# EAGLE board plate (EAGLE 9.5.0)
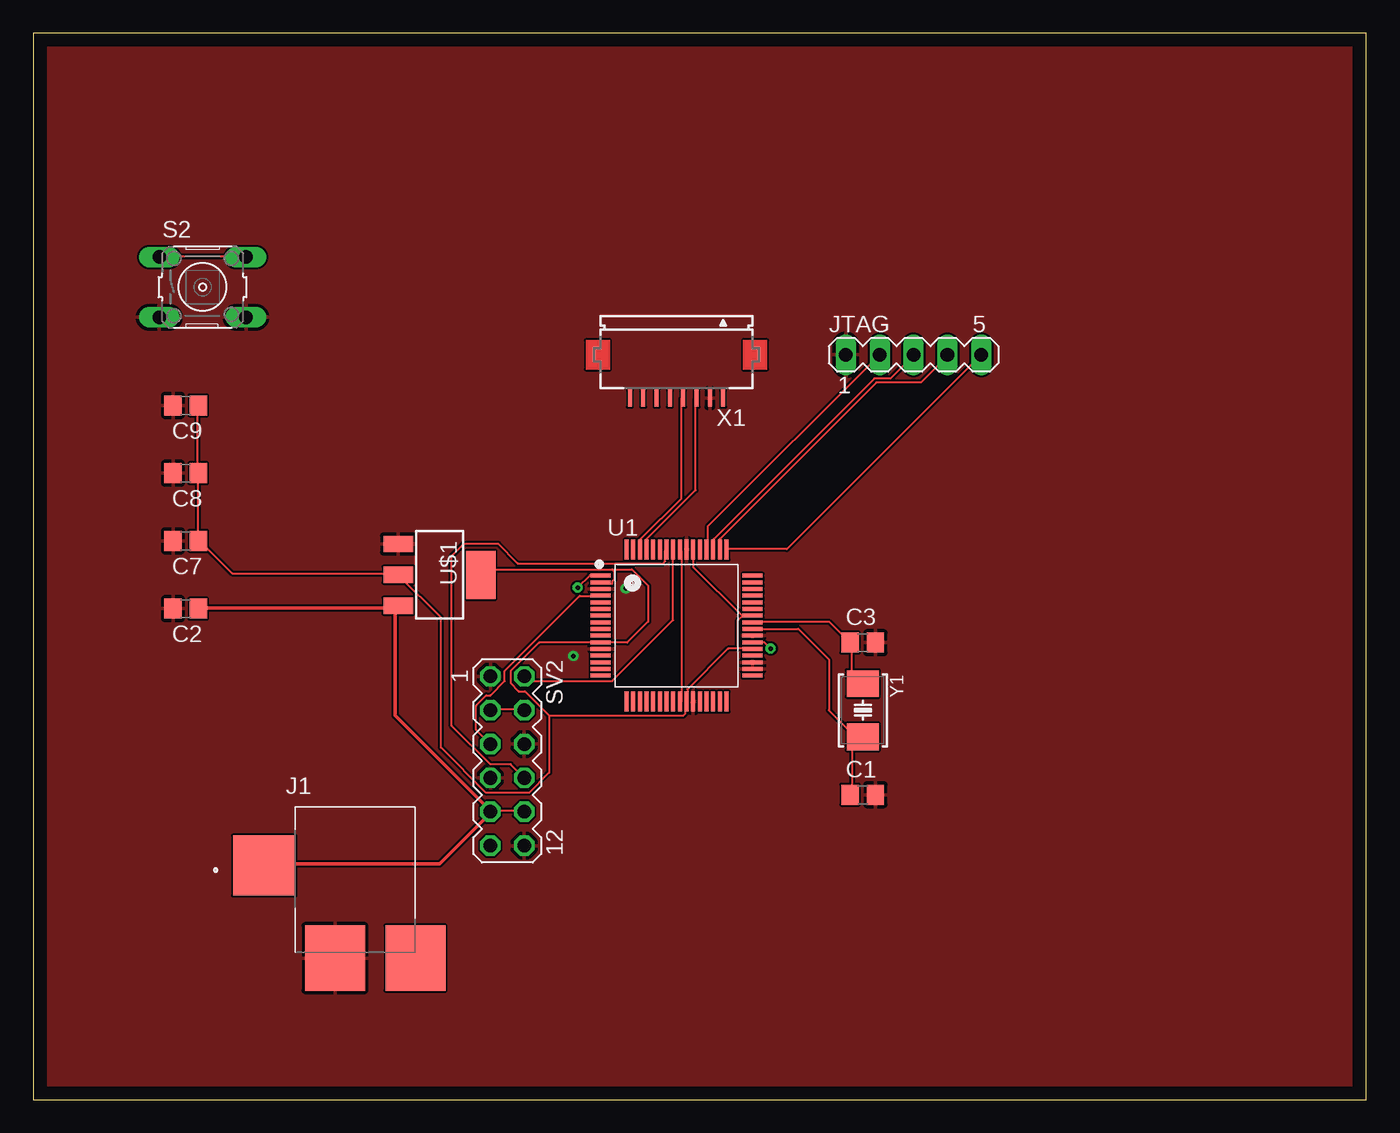
[diagram p0: board, top side]
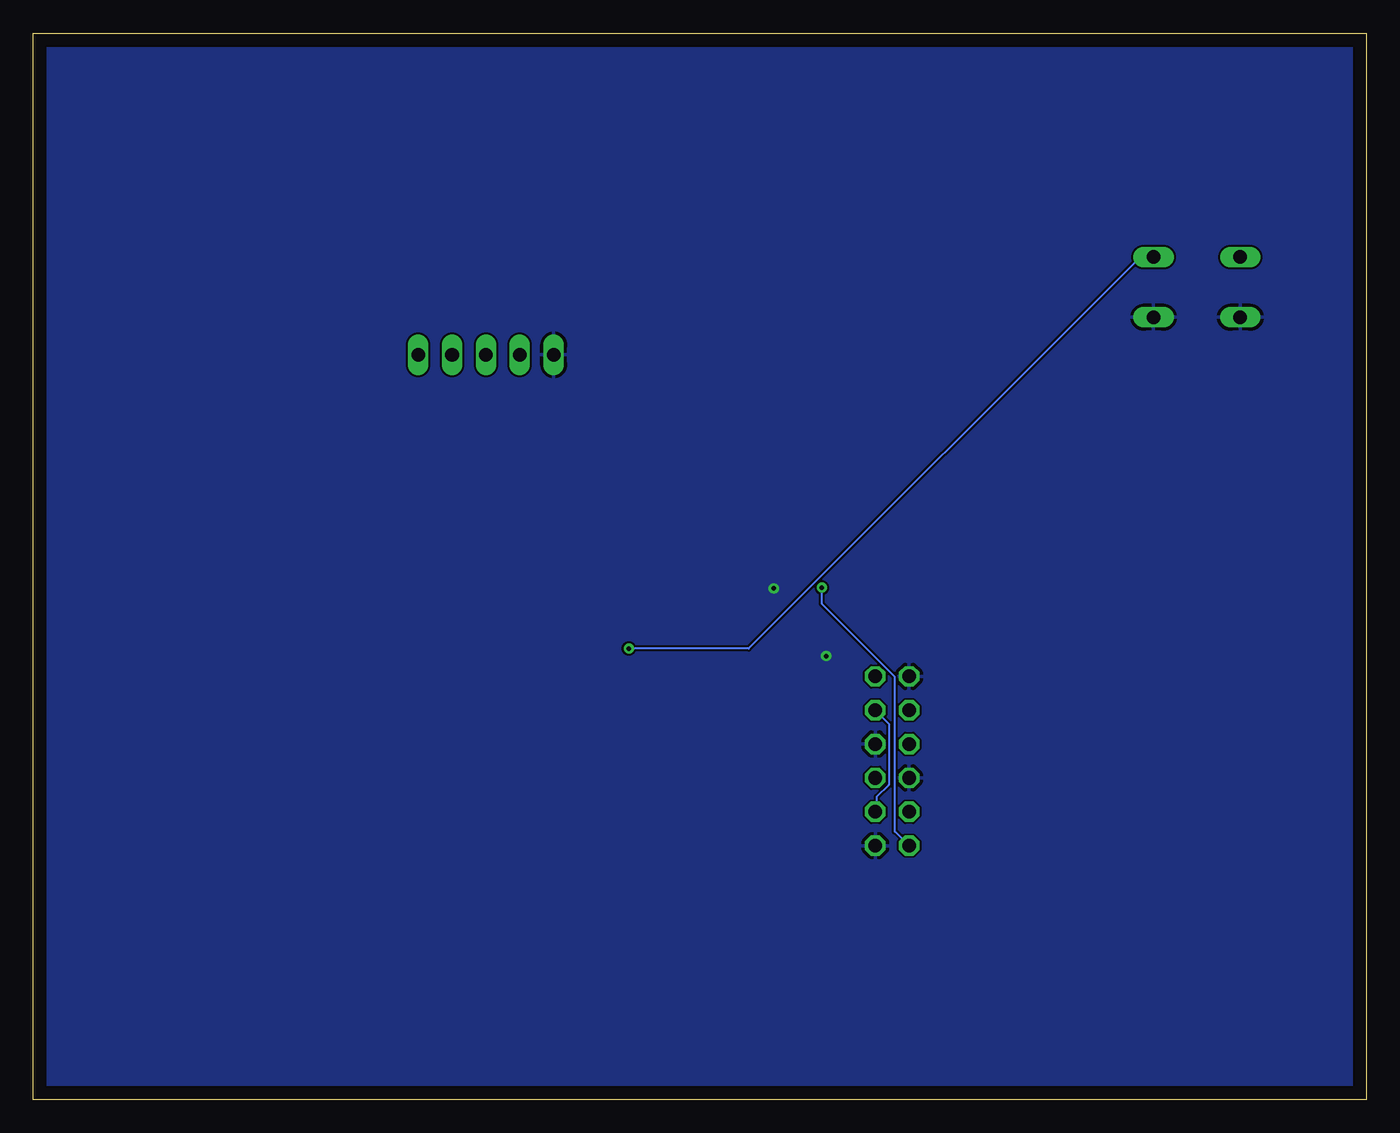
[diagram p1: board, bottom side, seen from below]

Size 100 x 80 mm. Coordinates in mm from the lower left corner, seen from the top.
Outline: 0,0 100,0 100,80 0,80 0,0
Copper layers (1*16): Top 0.035mm / dielectric 1.5mm / Bottom 0.035mm
Design rules "default": minimum track width 6mil, minimum drill 0.35mm, track to track 6mil, track to pad 6mil, pad to pad 6mil, via to via 6mil, smd to smd 6mil, copper to edge 40mil, drill to drill 6mil, minimum pad ring 10mil, minimum via ring 8mil, stop-mask expansion 4mil, vias tented up to drill 0mil, thermal gap 10mil

## Footprints (pad centres in the part's own frame; a part is rotated, then mirrored left to right if it is on the bottom)
C0805 = smd 1.3 x 1.5: 1 -0.95,0; 2 0.95,0
CUI_PJ-PJ-070BH-SMT-TR = smd 4.7 x 4.5: 1 -6.8,1.05 | smd 4.5 x 4.9: 2 -1.5,-5.9; 3 4.55,-5.9
MA05-1 = drill 1.016 long: 1 -5.08,0; 2 -2.54,0; 3 0,0; 4 2.54,0; 5 5.08,0
B3F-10XX = drill 1.016 long: 1 -3.251,2.261; 2 3.251,2.261; 3 -3.251,-2.261; 4 3.251,-2.261
MA06-2 = drill 1.016 octagon: 1 -6.35,-1.27; 2 -6.35,1.27; 3 -3.81,-1.27; 4 -3.81,1.27; 5 -1.27,-1.27; 6 -1.27,1.27; 7 1.27,-1.27; 8 1.27,1.27; 9 3.81,-1.27; 10 3.81,1.27; 11 6.35,-1.27; 12 6.35,1.27
QFP50P1200X1200X160-64N = smd 1.5 x 0.3: 1 -5.7,3.75; 2 -5.7,3.25; 3 -5.7,2.75; 4 -5.7,2.25; 5 -5.7,1.75; 6 -5.7,1.25; 7 -5.7,0.75; 8 -5.7,0.25; 9 -5.7,-0.25; 10 -5.7,-0.75; 11 -5.7,-1.25; 12 -5.7,-1.75; 13 -5.7,-2.25; 14 -5.7,-2.75; 15 -5.7,-3.25; 16 -5.7,-3.75; 33 5.7,-3.75; 34 5.7,-3.25; 35 5.7,-2.75; 36 5.7,-2.25; 37 5.7,-1.75; 38 5.7,-1.25; 39 5.7,-0.75; 40 5.7,-0.25; 41 5.7,0.25; 42 5.7,0.75; 43 5.7,1.25; 44 5.7,1.75; 45 5.7,2.25; 46 5.7,2.75; 47 5.7,3.25; 48 5.7,3.75 | smd 0.3 x 1.5: 17 -3.75,-5.7; 18 -3.25,-5.7; 19 -2.75,-5.7; 20 -2.25,-5.7; 21 -1.75,-5.7; 22 -1.25,-5.7; 23 -0.75,-5.7; 24 -0.25,-5.7; 25 0.25,-5.7; 26 0.75,-5.7; 27 1.25,-5.7; 28 1.75,-5.7; 29 2.25,-5.7; 30 2.75,-5.7; 31 3.25,-5.7; 32 3.75,-5.7; 49 3.75,5.7; 50 3.25,5.7; 51 2.75,5.7; 52 2.25,5.7; 53 1.75,5.7; 54 1.25,5.7; 55 0.75,5.7; 56 0.25,5.7; 57 -0.25,5.7; 58 -0.75,5.7; 59 -1.25,5.7; 60 -1.75,5.7; 61 -2.25,5.7; 62 -2.75,5.7; 63 -3.25,5.7; 64 -3.75,5.7
SOT223 = smd 1.219 x 2.235: 1 -2.311,-3.099; 2 0,-3.099; 3 2.311,-3.099 | smd 3.6 x 2.2: 4 0,3.099
FH12-08S-1SH = smd 0.3 x 1.3: 1 -3.5,3.25; 2 -2.5,3.25; 3 -1.5,3.25; 4 -0.5,3.25; 5 0.5,3.25; 6 1.5,3.25; 7 2.5,3.25; 8 3.5,3.25
2-SMD-5X3 = smd 2 x 2.4: 1 -2,0; 2 2,0

## Placement (x,y rotation side)
C1  1uF  [C0805]  62.23,22.86 0 top
C2  4.7uF  [C0805]  11.43,36.83 180 top
C3  1uF  [C0805]  62.23,34.29 0 top
C7  4.7uF  [C0805]  11.43,41.91 180 top
C8  1uF  [C0805]  11.43,46.99 180 top
C9  1uF  [C0805]  11.43,52.07 180 top
J1  PJ-070BH-SMT-TR  [CUI_PJ-PJ-070BH-SMT-TR]  24.13,16.51 0 top
JTAG  [MA05-1]  66.04,55.88 0 top
S2  [B3F-10XX]  12.7,60.96 0 top
SV2  [MA06-2]  35.56,25.4 270 top
U1  TM4C123GH6PMI  [QFP50P1200X1200X160-64N]  48.26,35.56 0 top
U$1  AP2114H-3.3TRG1  [SOT223]  30.48,39.37 270 top
X1  FH12-08S-1SH  [FH12-08S-1SH]  48.26,55.88 180 top
Y1  NX5032GA  [2-SMD-5X3]  62.23,29.21 270 top

## Library data of the parts
C1-C3 C7-C9 = rcl; SPICEPREFIX: C
J1 = PJ-070BH-SMT-TR; CUI_PURCHASE_URL: https://www.cuidevices.com/product/interconnect/connectors/dc-power-connectors/jacks/pj-070bh-smt-tr?utm_source=snapeda.com&utm_medium=referral&utm_campaign=snapedaBOM; DESCRIPTION: 2.5 x 6.3 mm, 5.0 A, Vertical, Surface Mount _SMT_, Dc Power Jack Connector; DIGI-KEY_PART_NUMBER: CP-070BHPJCT-ND; DIGI-KEY_PURCHASE_URL: https://www.digikey.com/product-detail/en/cui-devices/PJ-070BH-SMT-TR/CP-070BHPJCT-ND/3466653?utm_source=snapeda&utm_medium=aggregator&utm_campaign=symbol; MF: CUI Devices; MP: PJ-070BH-SMT-TR; PACKAGE: None
JTAG SV2 = con-lstb; OC_FARNELL: unknown; OC_NEWARK: unknown
S2 = switch-omron; MPN: B3F-1000; OC_FARNELL: 176432; OC_NEWARK: 36M3542
U1 = TM4C123GH6PMI; AVAILABILITY: Unavailable; DESCRIPTION: MCU 32-Bit Tiva C ARM Cortex M4F RISC 256KB Flash 1.2V/3.3V 64-Pin LQFP Tray/Tube; MF: Texas Instruments; MP: TM4C123GH6PMI; PACKAGE: LQFP-64 Texas Instruments; PRICE: None
U$1 = AP2114
X1 = con-hirose; OC_FARNELL: unknown; OC_NEWARK: unknown
Y1 = NX5032GA; AVAILABILITY: Unavailable; DESCRIPTION: 20MHz, 50ppm, NX5032GA, QUARTZ CRYSTAL/20MH; MF: NDK America,; MP: NX5032GA; PACKAGE: SMD-2 NDK America,; PRICE: None

## Nets
3,3V: X1.1
3.3V: C7.1 C8.1 C9.1 U1.2 U1.11 U1.26 U1.37 U1.42 U1.54 U$1.2 U$1.4
5V: C2.1 J1.1 SV2.3 SV2.4 SV2.9 SV2.10 U$1.3
GND: C1.2 C2.2 C3.2 C7.2 C8.2 C9.2 J1.2 JTAG.1 S2.3 S2.4 SV2.1 SV2.6 SV2.7 SV2.12 U1.3 U1.12 U1.27 U1.34 U1.35 U1.39 U1.55 U$1.1 X1.2
N$6: S2.1 S2.2 U1.38
N$13: X1.5
N$14: X1.6
N$15: X1.7
N$16: X1.8
OSC0: C1.1 U1.40 Y1.2
OSC1: C3.1 U1.41 Y1.1
PA2: U1.19
PA3: U1.20
PA5: U1.22
RESX: U1.61 X1.3
RESY: U1.62 X1.4
SERV0: SV2.8 U1.58
SERV1: SV2.2 U1.57
SERV2: SV2.11 U1.1
SERV3: SV2.5 U1.4
TCK: JTAG.2 U1.52
TDI: JTAG.4 U1.50
TDO: JTAG.5 U1.49
TMS: JTAG.3 U1.51
VDDC: U1.25 U1.56
WAKE: U1.32

## Tracks (layer width: path | path; a pad name or v marks a point on that pad's centre or on a via)
3.3V
  Top 0.152: C9.1 12.34,51.97 12.34,47.09 C8.1 12.34,46.94 12.34,41.91 C7.1 12.5,41.91 14.94,39.47 27.28,39.47 U$1.2 30.58,36.17 30.58,26.42 33.98,23.01 37.19,23.01 38.71,24.54 38.71,28.8 | 52.88,33.83 53.95,33.83 U1.37 | 52.88,33.83 52.12,33.83 49.07,30.79 49.07,29.87 U1.26 48.92,29.72 48.92,28.96 48.77,28.8 38.71,28.8 | 53.19,36.27 53.95,36.27 U1.42 | 53.19,36.27 52.88,35.97 52.88,33.83 | 53.19,36.27 49.53,39.93 49.53,41.15 U1.54 | 43.43,39.78 44.91,39.78 46.13,38.56 46.13,35.87 44.55,34.29 42.67,34.29 U1.11 42.52,34.29 37.95,34.29 35.81,32.16 35.81,31.24 36.42,30.63 36.88,30.63 38.71,28.8 | U1.2 42.67,38.71 43.43,38.71 43.43,38.86 43.59,39.01 43.59,39.62 43.43,39.78 | 43.43,39.78 33.98,39.78 33.68,39.47 U$1.4
5V
  Top 0.152: 12.5,36.88 C2.1 | SV2.10 36.73,21.64 34.29,21.64 SV2.9 34.29,21.49 | SV2.3 34.29,29.26 36.73,29.26 SV2.4 | 17.37,17.68 J1.1 | 27.28,37.03 27.13,36.88 U$1.3 27.28,37.03
  Top 0.254: 12.5,36.88 27.13,36.88 27.13,28.8 34.29,21.64 | 17.37,17.68 30.48,17.68 34.29,21.49
  Bottom 0.152: SV2.4 35.81,28.19 35.81,23.62 36.73,22.71 36.73,21.64 SV2.10
GND  (via drill 0.35)
  other vias: 44.45,38.35 40.51,33.27
  pour Top: 101.6,-1.27 -1.27,-1.27 -1.27,81.28 101.6,81.28
  pour Bottom: -1.27,0 -1.27,81.28 100.33,81.28 100.33,-1.27 -1.27,-1.27
N$6  (via drill 0.35)
  Top 0.152: v55.32,33.83 54.86,34.29 54.1,34.29 U1.38 | S2.1 9.45,63.25 15.85,63.25 S2.2
  Bottom 0.152: v55.32,33.83 46.33,33.83 17.07,63.09 16,63.09 S2.2
OSC0
  Top 0.152: 54.1,35.2 U1.40 57.4,35.31 59.69,33.02 59.69,29.21 61.01,27.89 62.18,27.89 62.18,27.28 Y1.2 62.18,27.13 61.42,26.36 61.42,22.86 C1.1
OSC1
  Top 0.152: Y1.1 62.18,31.24 61.42,32 61.42,34.29 C3.1 61.27,34.29 59.74,35.81 54.1,35.81 U1.41
RESX
  Top 0.152: X1.3 49.68,52.58 49.68,45.72 46.02,42.06 46.02,41.3 U1.61
RESY
  Top 0.152: X1.4 48.62,52.58 48.62,45.11 45.57,42.06 45.57,41.3 U1.62
SERV0
  Top 0.152: SV2.8 35.81,25.15 34.29,25.15 31.39,28.04 31.39,40.79 32.31,41.71 34.87,41.71 36.35,40.23 47.24,40.23 47.4,40.39 47.4,41.15 U1.58
SERV1
  Top 0.152: SV2.2 37.19,31.39 43.43,31.39 48.01,35.97 48.01,41.15 U1.57
SERV2  (via drill 0.35)
  Top 0.152: v40.84,38.41 41.76,39.32 42.52,39.32 U1.1
  Bottom 0.152: v40.84,38.41 40.84,37.19 35.36,31.7 35.36,20.12 SV2.11
SERV3
  Top 0.152: SV2.5 33.22,27.74 33.22,29.57 33.98,30.33 34.29,30.33 35.36,31.39 35.36,32.16 41,37.8 42.52,37.8 U1.4
TCK
  Top 0.152: JTAG.2 50.6,42.98 50.6,41.3 U1.52
TDI
  Top 0.152: U1.50 51.51,41.3 51.51,42.06 63.25,53.8 66.6,53.8 68.58,55.78 JTAG.4
TDO
  Top 0.152: JTAG.5 56.54,41.3 52.12,41.3 U1.49
TMS
  Top 0.152: U1.51 51.05,41.3 51.05,42.06 63.09,54.1 64.31,54.1 65.99,55.78 JTAG.3
VDDC
  Top 0.152: U1.25 48.62,29.87 48.62,41.15 U1.56